# Allegro board sophum_pro_power_v1.brd
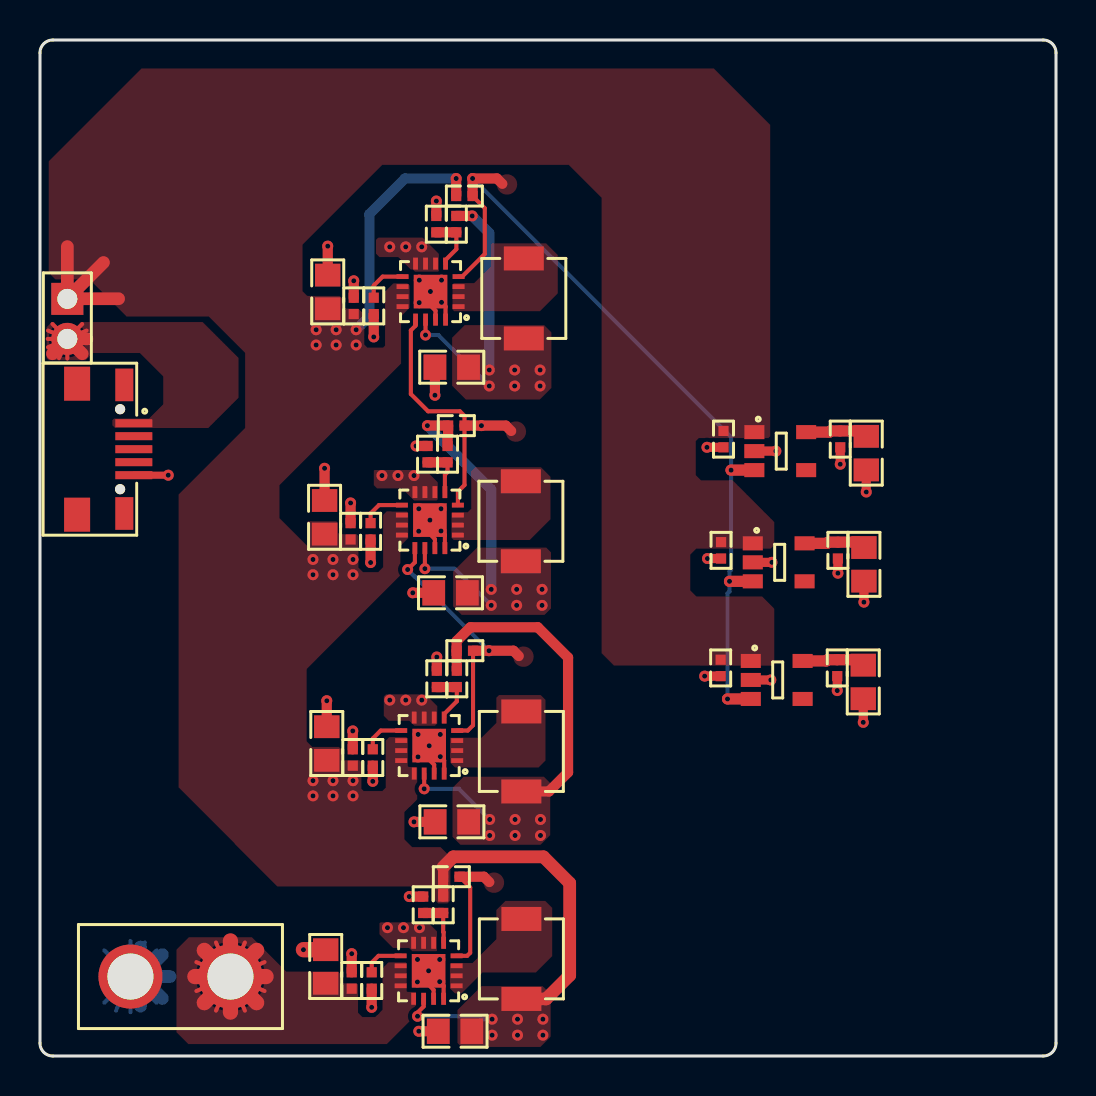
[diagram p0: board, top side]
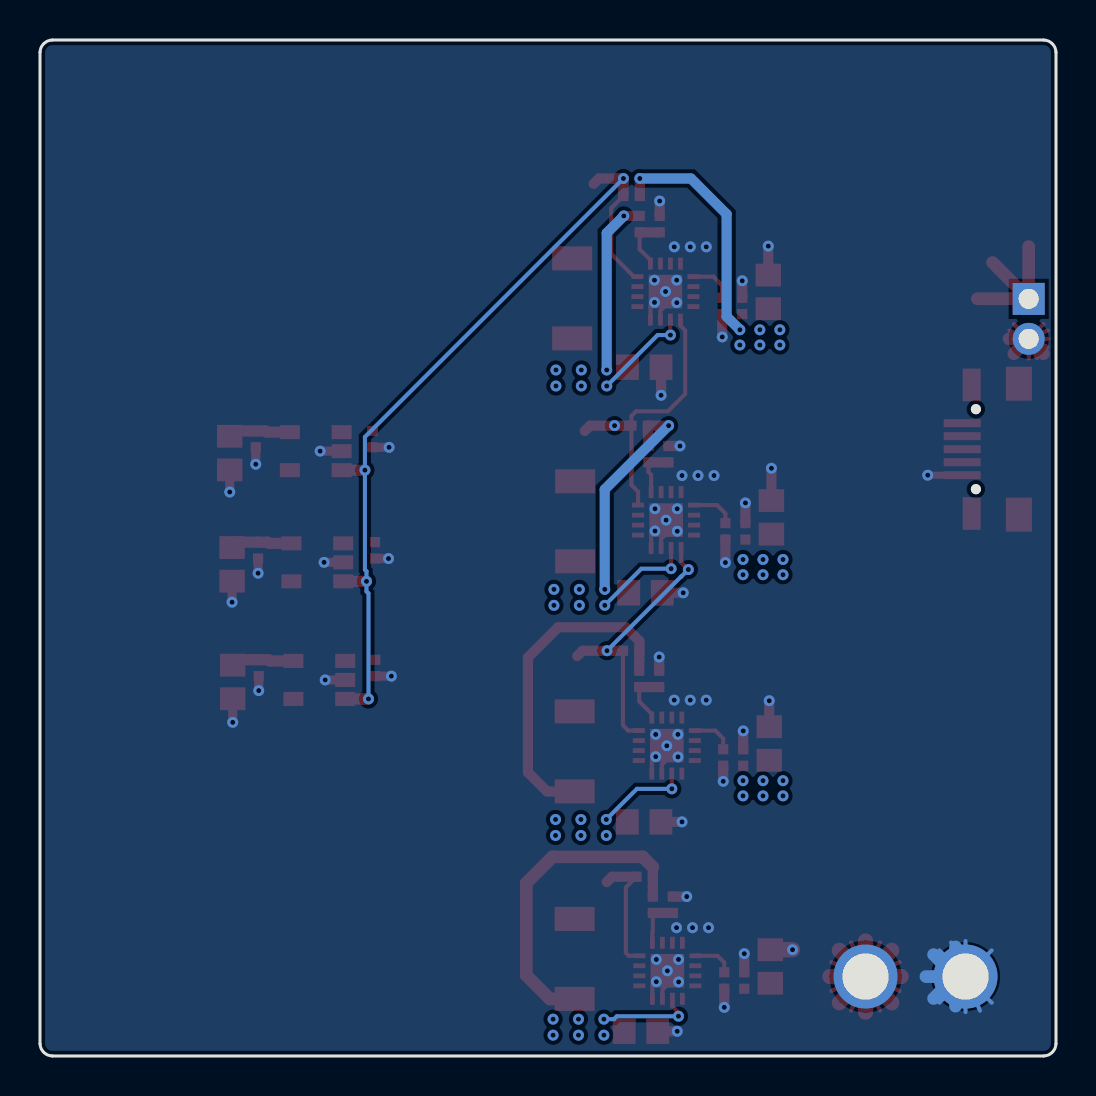
[diagram p1: board, bottom side, seen from below]

Outline 50.8 x 50.8 mm; copper layers: TOP, BOTTOM. Coordinates in mm from the lower left corner of the outline.
Outline path: 0,50.16 0,0.64 arc(0.19,0.19) 0.64,0 50.16,0 arc(50.61,0.19) 50.8,0.64 50.8,50.16 arc(50.61,50.61) 50.16,50.8 0.64,50.8 arc(0.19,50.61) 0,50.16

## Placement (name value [footprint] x y rotation side)
C1  22uF  [C0805]  20.59 11.71 180 top
C2  22uF  [C0805]  20.53 23.16 180 top
C3  10uF  [C0805]  14.34 15.63 90 top
C4  0.1uF  [C0402]  15.64 14.93 90 top
C5  3.3nF  [C0402]  16.64 14.93 270 top
C6  10uF  [C0805]  14.23 26.93 90 top
C7  0.1uF  [C0402]  15.53 26.23 90 top
C8  3.3nF  [C0402]  16.53 26.23 270 top
C9  0.1uF  [C0402]  34.18 30.84 270 top
C10  10uF  [C0805]  41.31 30.14 270 top
C11  0.1uF  [C0402]  40.01 30.84 270 top
C12  22uF  [C0805]  20.59 34.44 180 top
C13  10uF  [C0805]  14.39 38.2 90 top
C14  0.1uF  [C0402]  15.69 37.5 90 top
C15  3.3nF  [C0402]  16.69 37.5 270 top
C16  0.1uF  [C0402]  34.05 25.28 270 top
C17  10uF  [C0805]  41.2 24.58 270 top
C18  0.1uF  [C0402]  39.9 25.28 270 top
C19  0.1uF  [C0402]  34.03 19.4 270 top
C20  10uF  [C0805]  41.16 18.7 270 top
C21  0.1uF  [C0402]  39.86 19.4 270 top
C22  22uF  [C0805]  20.75 1.24 180 top
C23  10uF  [C0805]  14.28 4.48 90 top
C24  0.1uF  [C0402]  15.59 3.78 90 top
C25  3.3nF  [C0402]  16.59 3.78 270 top
J1  LiBAT-XT30UPB-M  [PLUG-2-10R20X5R20]  7.02 3.97 270 top
J2  JUMPER-2X1  [HDR2X1-2R00-TM-VM]  1.37 37.86 270 top
J3  USB_MICRO  [USB-MICRO-5-SM]  3.04 30.34 270 top
L1  2.2uH 5000mA  [PL-2-2R00X1R20-SM]  24.07 15.23 270 top
L2  2.2uH 5000mA  [PL-2-2R00X1R20-SM]  24.04 26.74 270 top
L3  2.2uH 5000mA  [PL-2-2R00X1R20-SM]  24.19 37.88 270 top
L4  2.2uH 5000mA  [PL-2-2R00X1R20-SM]  24.07 4.85 270 top
R1  10K  [R0402]  21.24 20.26 0 top
R2  4.99K  [R0402]  20.84 18.86 270 top
R3  10K  [R0402]  20.82 31.52 0 top
R4  18.7K  [R0402]  20.38 30.09 270 top
R5  20K  [R0402]  19.84 18.86 90 top
R6  15K  [R0402]  19.38 30.09 90 top
R7  10K  [R0402]  21.22 43 0 top
R8  13K  [R0402]  20.82 41.59 270 top
R9  15K  [R0402]  19.82 41.59 90 top
R10  10K  [R0402]  20.57 8.96 0 top
R11  95.3K  [R0402]  20.16 7.56 270 top
R12  18K  [R0402]  19.16 7.56 90 top
U1  TLV62130RGT  [VQFN-16-0R60X0R24]  19.46 15.52 180 top
U2  TLV62130RGT  [VQFN-16-0R60X0R24]  19.49 26.79 180 top
U3  SPX3819M5-L-3-3  [SOT-23-3-1R00X0R70]  37.01 30.24 270 top
U4  TLV62130RGT  [VQFN-16-0R60X0R24]  19.53 38.22 180 top
U5  SPX3819M5-L-3-3  [SOT-23-3-1R00X0R70]  36.93 24.68 270 top
U6  SPX3819M5-L-3-3  [SOT-23-3-1R00X0R70]  36.84 18.8 270 top
U7  TLV62130RGT  [VQFN-16-0R60X0R24]  19.43 4.26 180 top

## Library data of the parts
C1-C25 = CAPACITOR-NON-POL
J1 J2 = JUMPER-2X1
J3 = USB_MICRO
L1-L4 = INDUCTOR
R1-R12 = RESISTOR
U1 U2 U4 U7 = TLV62130RGT
U3 U5 U6 = SPX3819M5-L-3-3

## Footprints (pads in the part's own frame, mm; a bottom-side part is the same pattern mirrored in y, then rotated)
C0402
  rect 0.51x0.51 smd: 1(-0.41,0) 2(0.41,0)
C0805
  rect 1.14x1.27 smd: 1(-0.84,0) 2(0.84,0)
HDR2X1-2R00-TM-VM
  rect 1.6x1.6 hole 1: 1(0,0)
  round 1.6 hole 1: 2(2,0)
PL-2-2R00X1R20-SM
  rect 1.2x2 smd: 1(-2,0) 2(2,0)
PLUG-2-10R20X5R20
  round 3.2 hole 2.3: 1(0,2.5) 2(0,-2.5)
R0402
  rect 0.51x0.51 smd: 1(-0.41,0) 2(0.41,0)
SOT-23-3-1R00X0R70
  rect 0.7x1 smd: 1(-0.95,-1.295) 2(0,-1.295) 3(0.95,-1.295) 4(0.95,1.295) 5(-0.95,1.295)
USB-MICRO-5-SM
  rect 0.4x1.85 smd: 1(-1.3,1.655) 2(-0.65,1.655) 3(0,1.655) 4(0.65,1.655) 5(1.3,1.655)
  rect 1.63x0.9 smd: 6(-3.215,1.18) 7(3.215,1.18)
  rect 1.7x1.3 smd: 8(-3.275,-1.18) 9(3.275,-1.18)
  round 0.51 hole 0.5: 10(-2,0.97) 11(2,0.97)
VQFN-16-0R60X0R24
  rect 0.6x0.24 smd: 1(-1.4,0.75) 2(-1.4,0.25) 3(-1.4,-0.25) 4(-1.4,-0.75) 9(1.4,-0.75) 10(1.4,-0.25) 11(1.4,0.25) 12(1.4,0.75)
  rect 0.24x0.6 smd: 5(-0.75,-1.4) 6(-0.25,-1.4) 7(0.25,-1.4) 8(0.75,-1.4) 13(0.75,1.4) 14(0.25,1.4) 15(-0.25,1.4) 16(-0.75,1.4)
  rect 1.68x1.68 smd: 17(0,0)

## Nets
1V0_PG: R1.2 U1.4(PG) U2.13(EN)
1V5_PG: R7.2 U3.3(EN) U4.4(PG) U5.3(EN) U6.3(EN)
1V8_PG: R3.2 U2.4(PG) U4.13(EN)
GND: C1.2 C2.2 C3.2 C4.2 C5.2 C6.2 C7.2 C8.2 C9.2 C10.2 C11.2 C12.2 C13.2 C14.2 C15.2 C16.2 C17.2 C18.2 C19.2 C20.2 C21.2 C22.2 C23.2 C24.2 C25.2 J1.2 J3.5(GND) R5.2 R6.2 R9.2 R12.2 U1.6(AGND3) U1.7(FSW) U1.8(DEF) U1.15(PGND2) U1.16(PGND1) U1.17(TPAD) U2.6(AGND3) U2.7(FSW) U2.8(DEF) U2.15(PGND2) U2.16(PGND1) U2.17(TPAD) U3.2(GND) U4.6(AGND3) U4.7(FSW) U4.8(DEF) U4.15(PGND2) U4.16(PGND1) U4.17(TPAD) U5.2(GND) U6.2(GND) U7.6(AGND3) U7.7(FSW) U7.8(DEF) U7.15(PGND2) U7.16(PGND1) U7.17(TPAD)
VCC_1V0: C1.1 L1.2 R1.1 R2.1 U1.14(VOS)
VCC_1V5: C12.1 L3.2 R8.1 U4.14(VOS)
VCC_1V8: C2.1 L2.2 R3.1 R4.1 U2.14(VOS)
VCC_3V3: C10.1 C11.1 U3.5(VOUT)
VCC_5V0: C3.1 C4.1 C6.1 C7.1 C9.1 C13.1 C14.1 C16.1 C19.1 C22.1 J2.1 L4.2 R7.1 R10.1 R11.1 U1.10(AVIN1) U1.11(PVIN2) U1.12(PVIN3) U1.13(EN) U2.10(AVIN1) U2.11(PVIN2) U2.12(PVIN3) U3.1(VIN) U4.10(AVIN1) U4.11(PVIN2) U4.12(PVIN3) U5.1(VIN) U6.1(VIN) U7.14(VOS)
VCC_BAT: C23.1 C24.1 J1.1 U7.10(AVIN1) U7.11(PVIN2) U7.12(PVIN3) U7.13(EN)
VCCIO_34: C17.1 C18.1 U5.5(VOUT)
VCCIO_35: C20.1 C21.1 U6.5(VOUT)
N1250046: C5.1 U1.9(SS/TR)
N1250130: L1.1 U1.1(SW1) U1.2(SW2) U1.3(SW3)
N1250186: R2.2 R5.1 U1.5(FB)
N1250466: C8.1 U2.9(SS/TR)
N1250532: L2.1 U2.1(SW1) U2.2(SW2) U2.3(SW3)
N1250588: R4.2 R6.1 U2.5(FB)
N1250876: C15.1 U4.9(SS/TR)
N1250970: L3.1 U4.1(SW1) U4.2(SW2) U4.3(SW3)
N1251010: R8.2 R9.1 U4.5(FB)
N1251478: C25.1 U7.9(SS/TR)
N1251590: L4.1 U7.1(SW1) U7.2(SW2) U7.3(SW3)
N1251656: R11.2 R12.1 U7.5(FB)
N1251700: R10.2 U7.4(PG)
N1252912: J2.2 J3.1(VCC)

Pads without a net: J3 2 3 4 6 7 8 9 10 11; U3 4; U5 4; U6 4

## Via types
v1: diameter 0.55, hole 0.254, TOP to BOTTOM, 121 vias

## Routing (per net, layer and track width the routed paths; a pad name or vN(x,y) marks a point on that pad's centre or on a via; arc(x,y) is an arc through that point)
1V0_PG: length 14
  TOP w0.203: R1.2 21.65,16.54 21.39,16.27 U1.4 ; U2.13 18.74,24.69 v1(18.38,24.32)
  TOP w0.508: R1.2 v1(22.45,20.26) 23.67,20.26 23.94,20
  BOTTOM w0.203: v1(22.45,20.26) 18.75,23.97 18.74,23.97 v1(18.38,24.32)
1V5_PG: length 42.3
  TOP w0.203: U4.4 21.11,38.97 22.24,40.1 22.24,42.39 R7.2
  TOP w0.508: 23.12,43.61 22.85,43.87 v1(21.63,43.87) R7.2
  TOP w0.559: U5.3 v1(34.48,23.73) ; U6.3 v1(34.38,17.85) ; U3.3 v1(34.55,29.29)
  BOTTOM w0.203: v1(21.63,43.87) 34.55,30.95 v1(34.55,29.29) 34.55,24.32 34.48,24.24 v1(34.48,23.73) 34.48,23.23 34.38,23.13 v1(34.38,17.85)
1V8_PG: length 14
  TOP w0.203: U4.13 18.78,36.52 18.54,36.28 18.54,33.1 19.41,32.24 20.99,32.24 21.23,32 R3.2 21.23,28.55 20.89,28.22 U2.4
  TOP w0.508: 23.56,31.25 23.29,31.52 v1(22.07,31.52) R3.2
GND: length 71.9
  TOP w0.203: U2.15 19.74,25.85 19.5,26.09 v1(19.5,26.79) ; U4.17 20.28,37.47 U4.16 ; U1.15 19.71,14.56 19.46,14.81 U1.17 20.21,14.77 U1.16 ; U2.16 20.24,26.06 v1(20.05,26.25) ; v1(19.52,38.22) 19.52,37.52 19.78,37.27 U4.15 ; U7.15 19.68,3.31 19.43,3.56 v1(19.43,4.26) 20.18,3.51 U7.16
  TOP w0.356: J3.5 v1(6.41,29.04)
  TOP w0.457: C20.2 v1(41.16,16.68) ; U6.2 v1(36.54,18.8) ; C10.2 v1(41.31,28.2) ; C21.2 v1(39.86,18.27) ; U3.2 v1(36.79,30.24) ; U5.2 v1(36.6,24.68) ; C16.2 v1(33.37,24.87) ; C18.2 v1(39.9,24.14) ; C9.2 v1(33.35,30.43) ; C17.2 v1(41.2,22.69) ; C11.2 v1(40.01,29.59) ; C19.2 v1(33.23,18.99)
  TOP w0.508: v1(15.59,5.12) C24.2 ; R5.2 v1(19.84,19.95) ; C1.2 v1(18.7,11.71) ; v1(15.53,27.65) C7.2 ; C5.2 v1(16.64,13.73) ; C15.2 v1(16.69,35.95) ; C6.2 v1(14.23,29.39) ; C14.2 v1(15.69,38.76) ; C3.2 v1(14.34,17.76) ; v1(15.64,16.25) C4.2 ; C22.2 v1(18.94,1.24) ; C12.2 v1(19.75,33.04) ; C25.2 v1(16.59,2.43) ; R12.2 v1(18.46,7.97) ; C13.2 v1(14.39,40.49) ; R6.2 v1(18.8,30.5) ; C8.2 v1(16.53,24.67) ; R9.2 v1(19.82,42.75) ; C2.2 v1(18.64,23.16)
  TOP w0.762: C23.2 v1(13.17,5.32)
  BOTTOM w0.203: 3.8,2.27 J1.2 ; J1.2 5.83,2.66 ; J1.2 5.24,5.68 ; J1.2 4.52,5.75 ; J1.2 4.52,2.19 ; J1.2 3.21,5.28 ; J1.2 3.21,2.66 ; J1.2 5.83,5.28
  BOTTOM w0.635: 5.02,3.97 6.12,2.88 ; 5.02,3.97 3.93,5.07 ; 5.02,3.97 J1.2 3.54,3.97 ; 5.02,3.97 6.5,3.97 ; 5.02,3.97 5.02,5.45 ; 5.02,3.97 6.12,5.07 ; 5.02,3.97 3.93,2.88 ; 5.02,3.97 5.02,2.49
  vias: v1(17.1,29.02) v1(17.37,6.42) v1(17.49,40.46) v1(17.49,17.8) v1(17.9,29.02) v1(18.17,6.42) v1(18.29,40.46) v1(18.29,17.8) v1(18.7,29.02) v1(18.94,27.36) v1(18.94,26.24) v1(18.91,16.08) v1(18.9,14.96) v1(18.87,4.83) v1(18.87,3.7) v1(18.97,38.79) v1(18.96,37.67) v1(18.97,6.42) v1(19.09,40.46) v1(19.09,17.8) v1(19.46,15.51) v1(20.02,16.08) v1(20.02,14.97) v1(19.98,4.83) v1(19.98,3.72) v1(20.08,38.79) v1(20.08,37.68) v1(20.05,27.36)
VCC_1V0: length 21.2
  TOP w0.203: C1.1 21.43,11.77 ; U1.14 v1(19.21,13.36)
  TOP w0.508: R2.1 20.84,19.75 20.83,19.76 R1.1 20.83,20.75 21.52,21.44 24.89,21.44 26.4,19.92 26.4,14.18 25.45,13.23 L1.2
  BOTTOM w0.203: v1(19.21,13.36) 20.95,13.36 v1(22.48,11.83)
  vias: v1(22.48,11.03) v1(23.75,11.83) v1(23.75,11.03) v1(25.02,11.83) v1(25.02,11.03)
VCC_1V5: length 13.9
  TOP w0.203: U4.14 v1(19.28,36.05) ; C12.1 21.43,34.5
  TOP w0.508: R8.1 v1(21.61,42)
  BOTTOM w0.203: v1(19.28,36.05) 19.92,36.05 v1(22.46,33.5)
  BOTTOM w0.508: v1(21.61,42) 22.46,41.15 v1(22.46,34.3)
  vias: v1(23.73,34.3) v1(23.73,33.5) v1(25,34.3) v1(25,33.5)
VCC_1V8: length 16.7
  TOP w0.203: U2.14 v1(19.24,24.37) ; C2.1 21.37,23.22
  TOP w0.508: R4.1 20.38,31.01 20.41,31.04 R3.1 v1(19.37,31.52)
  BOTTOM w0.203: v1(22.56,22.53) 20.73,24.37 v1(19.24,24.37)
  BOTTOM w0.508: v1(22.56,23.33) 22.56,28.33 v1(19.37,31.52)
  vias: v1(23.83,23.33) v1(23.83,22.53) v1(25.1,23.33) v1(25.1,22.53)
VCC_3V3: length 3.1
  TOP w0.559: U3.5 39.47,31.19 39.53,31.25 C11.1 41.04,31.25 C10.1
VCC_5V0: length 40.8
  TOP w0.203: C22.1 21.59,1.3 ; v1(18.88,1.99) 18.88,1.99 18.88,2.17 19.18,2.48 U7.14
  TOP w0.508: 24.47,2.85 L4.2 ; R7.1 v1(20.81,43.87) ; 20.16,9.45 R10.1 20.16,8.48 20.16,8.48 R11.1
  TOP w0.635: 20.16,9.45 20.67,9.96 25.17,9.96 26.48,8.65 26.48,4.03 25.31,2.85 24.47,2.85 ; 1.33,37.83 3.17,39.67 ; 1.32,37.86 3.93,37.86 ; J2.1 1.37,40.47
  BOTTOM w0.203: v1(18.88,1.99) 21.96,1.99 22.1,1.84 v1(22.61,1.84)
  BOTTOM w0.508: v1(20.81,43.87) 18.25,43.87 16.47,42.09 16.47,36.97 v1(15.81,36.31)
  vias: v1(13.65,24.83) v1(13.65,24.06) v1(13.65,13.77) v1(13.65,13) v1(13.81,36.31) v1(13.81,35.55) v1(14.65,24.83) v1(14.65,24.06) v1(14.65,13.77) v1(14.65,13) v1(14.81,36.31) v1(14.81,35.55) v1(15.65,24.83) v1(15.65,24.06) v1(15.65,13.77) v1(15.65,13) v1(15.81,35.55) v1(22.61,1.04) v1(23.88,1.84) v1(23.88,1.04) v1(25.15,1.84) v1(25.15,1.04)
VCC_BAT: length 29.3
  TOP w0.203: J1.1 10.25,5.68 ; J1.1 11.23,4.69 ; J1.1 7.82,4.69 ; J1.1 8.8,2.27 ; J1.1 10.25,2.27 ; J1.1 11.23,3.25 ; J1.1 7.82,3.25 ; J1.1 8.8,5.68
  TOP w0.762: J1.1 8.22,5.28 ; J1.1 8.22,2.66 ; J1.1 7.74,3.97 ; J1.1 10.83,5.28 ; J1.1 9.52,5.75 ; J1.1 11.3,3.97 ; J1.1 10.83,2.66 ; J1.1 9.52,2.19
VCCIO_34: length 3.1
  TOP w0.559: C17.1 40.93,25.69 C18.1 39.41,25.69 39.35,25.63 U5.5
VCCIO_35: length 3.2
  TOP w0.559: U6.5 39.32,19.75 39.38,19.81 C21.1 40.89,19.81 C20.1
N1250046: length 2.1
  TOP w0.203: U1.9 17.04,16.27 16.64,15.87 C5.1
N1250186: length 2.8
  TOP w0.203: U1.5 20.21,17.1 20.84,17.73 R2.2
  TOP w0.508: R5.1 R2.2
N1250466: length 2.2
  TOP w0.203: C8.1 16.53,27.13 16.95,27.54 U2.9
N1250588: length 2.5
  TOP w0.203: U2.5 20.24,29.06 20.38,29.2 R4.2
  TOP w0.508: R6.1 R4.2
N1250876: length 2.2
  TOP w0.203: U4.9 17.13,38.97 16.69,38.52 C15.1
N1251010: length 2.8
  TOP w0.203: R8.2 20.82,40.34 20.28,39.8 U4.5
  TOP w0.508: R9.1 R8.2
N1251478: length 2.1
  TOP w0.203: C25.1 16.59,4.67 16.93,5.01 U7.9
N1251656: length 2.5
  TOP w0.203: R11.2 20.16,6.21 20.18,6.19 U7.5
  TOP w0.508: R11.2 R12.1
N1251700: length 6.4
  TOP w0.203: U7.4 21.36,5.01 21.51,5.16 21.51,8.43 R10.2
  TOP w0.508: 22.46,8.7 22.2,8.96 R10.2
N1252912: length 11.3
  TOP w0.203: 0.62,36.6 J2.2 ; J2.2 0.95,34.89 ; J2.2 0.39,35.86 ; J2.2 2.11,36.6 ; J2.2 0.4,36.27 ; J2.2 1.37,34.88 ; J2.2 2.33,36.27 ; J2.2 0.4,35.44
  TOP w0.635: J2.2 2.34,35.86 ; J2.2 2.11,35.11 ; J2.2 0.62,35.11

## Copper pours and planes (outline as drawn; the poured copper is in the pictures)
1V0_PG on TOP: 23.66,19.97 24.68,19.97
1V5_PG on TOP: 22.84,43.58 23.86,43.58
1V8_PG on TOP: 23.29,31.22 24.3,31.22
GND on TOP: 16.91,40.92 19.13,40.92 19.94,40.11 19.94,39.25 19.9,39.22 18.76,39.22 18.65,39.32 18.54,39.32 17.91,39.95 16.97,39.95 16.8,40.12 16.8,40.81
GND on TOP: 19.4,6.68 19.85,6.23 19.85,5.26 19.83,5.24 18.62,5.24 18.45,5.4 17.66,5.4 16.97,6.09 16.97,6.63 17.02,6.68
GND on TOP: 16.72,29.3 18.81,29.3 18.98,29.14 19.43,29.14 19.89,28.68 19.89,27.84 19.83,27.78 18.7,27.78 18.09,28.38 16.85,28.38 16.69,28.54 16.69,29.27
GND on TOP: 17.29,18.08 19.27,18.08 19.41,17.95 19.41,17.95 19.87,17.49 19.87,16.63 19.75,16.51 18.71,16.51 18.47,16.76 17.44,16.76 17.19,17.01 17.19,17.97
GND on BOTTOM: 0.64,0.26 0.37,0.37 0.26,0.64 0.26,50.16 0.37,50.43 0.64,50.54 50.16,50.54 50.43,50.43 50.54,50.16 50.54,0.64 50.43,0.37 50.16,0.26
VCC_1V0 on TOP: 21.03,10.56 20.62,10.96 20.62,13.41 21.18,13.96 25.19,13.96 25.51,13.64 25.51,11.05 25.03,10.56
VCC_1V5 on TOP: 21.3,32.82 20.61,33.51 20.61,35.92 21.23,36.54 25.21,36.54 25.57,36.18 25.57,33.41 24.98,32.82
VCC_1V8 on TOP: 21.08,22.06 20.66,22.48 20.66,24.22 21.85,25.42 25.31,25.42 25.55,25.18 25.55,22.37 25.23,22.06
VCC_5V0 on TOP: 6.93,28.07 10.26,31.4 10.26,35.15 8.44,36.97 4.33,36.97 2.47,38.83 0.76,38.83 0.44,39.16 0.44,44.74 5.08,49.38 33.69,49.38 36.51,46.56 36.51,30.99 36.41,30.89 32.93,30.89 32.79,30.75 32.79,29.04 33.05,28.78 34.63,28.78 36.72,26.7 36.72,25.55 36.54,25.37 32.81,25.37 32.51,25.07 32.51,23.28 32.82,22.98 36.1,22.98 36.72,22.36 36.72,19.68 36.56,19.52 32.97,19.52 32.96,19.52 28.7,19.52 28.08,20.14 28.08,42.91 26.43,44.56 17.11,44.56 13.13,40.57 13.13,38.23 13.36,38.01 14.98,38.01 15.16,37.83 15.16,37.51 15.3,37.37 15.92,37.37 16.22,37.07 16.22,35.57 16.37,35.42 17.15,35.42 17.25,35.52 17.25,38.22 17.66,38.63 18.37,38.63 18.49,38.51 18.49,37.42 18.06,36.99 18.06,34.62 11.97,28.54 11.97,26.9 13.38,25.49 13.38,26.72 13.39,26.74 14.82,26.74 14.9,26.65 14.9,26.16 14.98,26.09 15.83,26.09 15.92,26 15.92,24.43 16.15,24.19 16.91,24.19 17.16,24.44 17.16,27.03 17.14,27.04 17.34,27.23 18.33,27.23 18.41,27.16 18.41,25.89 18.02,25.5 18.02,24.04 13.86,19.88 13.86,19.87 13.34,19.35 13.34,15.73 13.61,15.45 14.95,15.45 15.17,15.23 15.17,14.85 15.23,14.79 15.97,14.79 16.07,14.69 16.07,13.36 16.18,13.25 17.12,13.25 17.29,13.42 17.29,15.77 17.47,15.94 18.31,15.94 18.39,15.87 18.39,14.5 18.44,14.45 18.81,14.45 18.86,14.4 18.86,12.83 18.48,12.45 18.47,12.45 18.22,12.19 18.22,10.83 18.24,10.81 18.24,10.81 18.27,10.78 18.61,10.44 20.03,10.44 20.52,9.96 20.52,7.78 20.37,7.63 19.91,7.63 19.73,7.81 19.73,8.32 19.58,8.48 11.87,8.48 9.74,10.61 9.74,10.62 6.93,13.43
VCC_5V0 on TOP: 21.07,0.45 20.87,0.65 20.87,2.29 22.07,3.5 25.13,3.5 25.53,3.1 25.53,0.96 25.02,0.45
VCC_BAT on TOP: 12.31,4.22 14.9,4.22 15.1,4.02 15.1,3.7 15.17,3.63 15.84,3.63 15.9,3.57 15.9,2.16 16.12,1.95 16.76,1.95 17.12,2.31 17.12,4.39 17.42,4.68 18.28,4.68 18.33,4.63 18.33,3.23 18.36,3.21 18.77,3.21 18.8,3.17 18.8,2.05 17.34,0.6 7.42,0.6 6.82,1.19 6.82,5.32 7.44,5.94 10.59,5.94
N1250130 on TOP: 22.82,16.66 22.82,17.91 22.95,18.05 25.03,18.05 25.28,17.81 25.28,14.78 24.93,14.43 20.75,14.43 20.5,14.68 20.5,15.91 22.08,15.91
N1250532 on TOP: 21.75,29.44 25.05,29.44 25.52,28.96 25.52,26.84 24.49,25.8 20.68,25.8 20.57,25.91 20.57,27.15 20.61,27.19 21.38,27.19 21.56,27.37 21.56,29.25
N1250970 on TOP: 22.61,40.63 25.31,40.63 25.89,40.05 25.89,38.13 25,37.24 20.71,37.24 20.63,37.32 20.63,38.58 20.69,38.64 21.7,38.64 22.56,39.5 22.56,40.58
N1251590 on TOP: 22.82,5.84 22.82,7.3 23.27,7.75 25.26,7.75 25.61,7.41 25.61,4.99 24.79,4.18 22.12,4.18 21.08,3.13 20.74,3.13 20.5,3.38 20.5,4.61 20.54,4.65 21.62,4.65
N1251700 on TOP: 22.19,8.67 23.21,8.67
N1252912 on TOP: 0.59,36.7 8.13,36.7 9.93,34.9 9.93,32.92 8.41,31.4 3.75,31.4 3.62,31.54 3.62,31.8 3.62,31.8 3.7,31.87 5.45,31.87 6.16,32.58 6.16,33.98 4.99,35.15 2.64,35.15 2.28,34.79 0.44,34.79 0.33,34.89 0.33,36.44

## Text on the board
NCLEGEND-1-2: FIGURE | SIZE | 10.0 | 39.37 | 70.87 | 78.74 | DRILL CHART: TOP to BOTTOM | ALL UNITS ARE IN MILS | PLATED | QTY | 125 | 2 | 3
